# Altium PCB ledsayici.PcbDoc
Units mm, origin at the board's own origin, x right, y up, seen from the top; angles counter-clockwise.
Board outline 56.77 x 56.64 mm, 2 copper layers (Top Layer, Bottom Layer); 28 components, 24 nets, 76 pads, 0 vias.
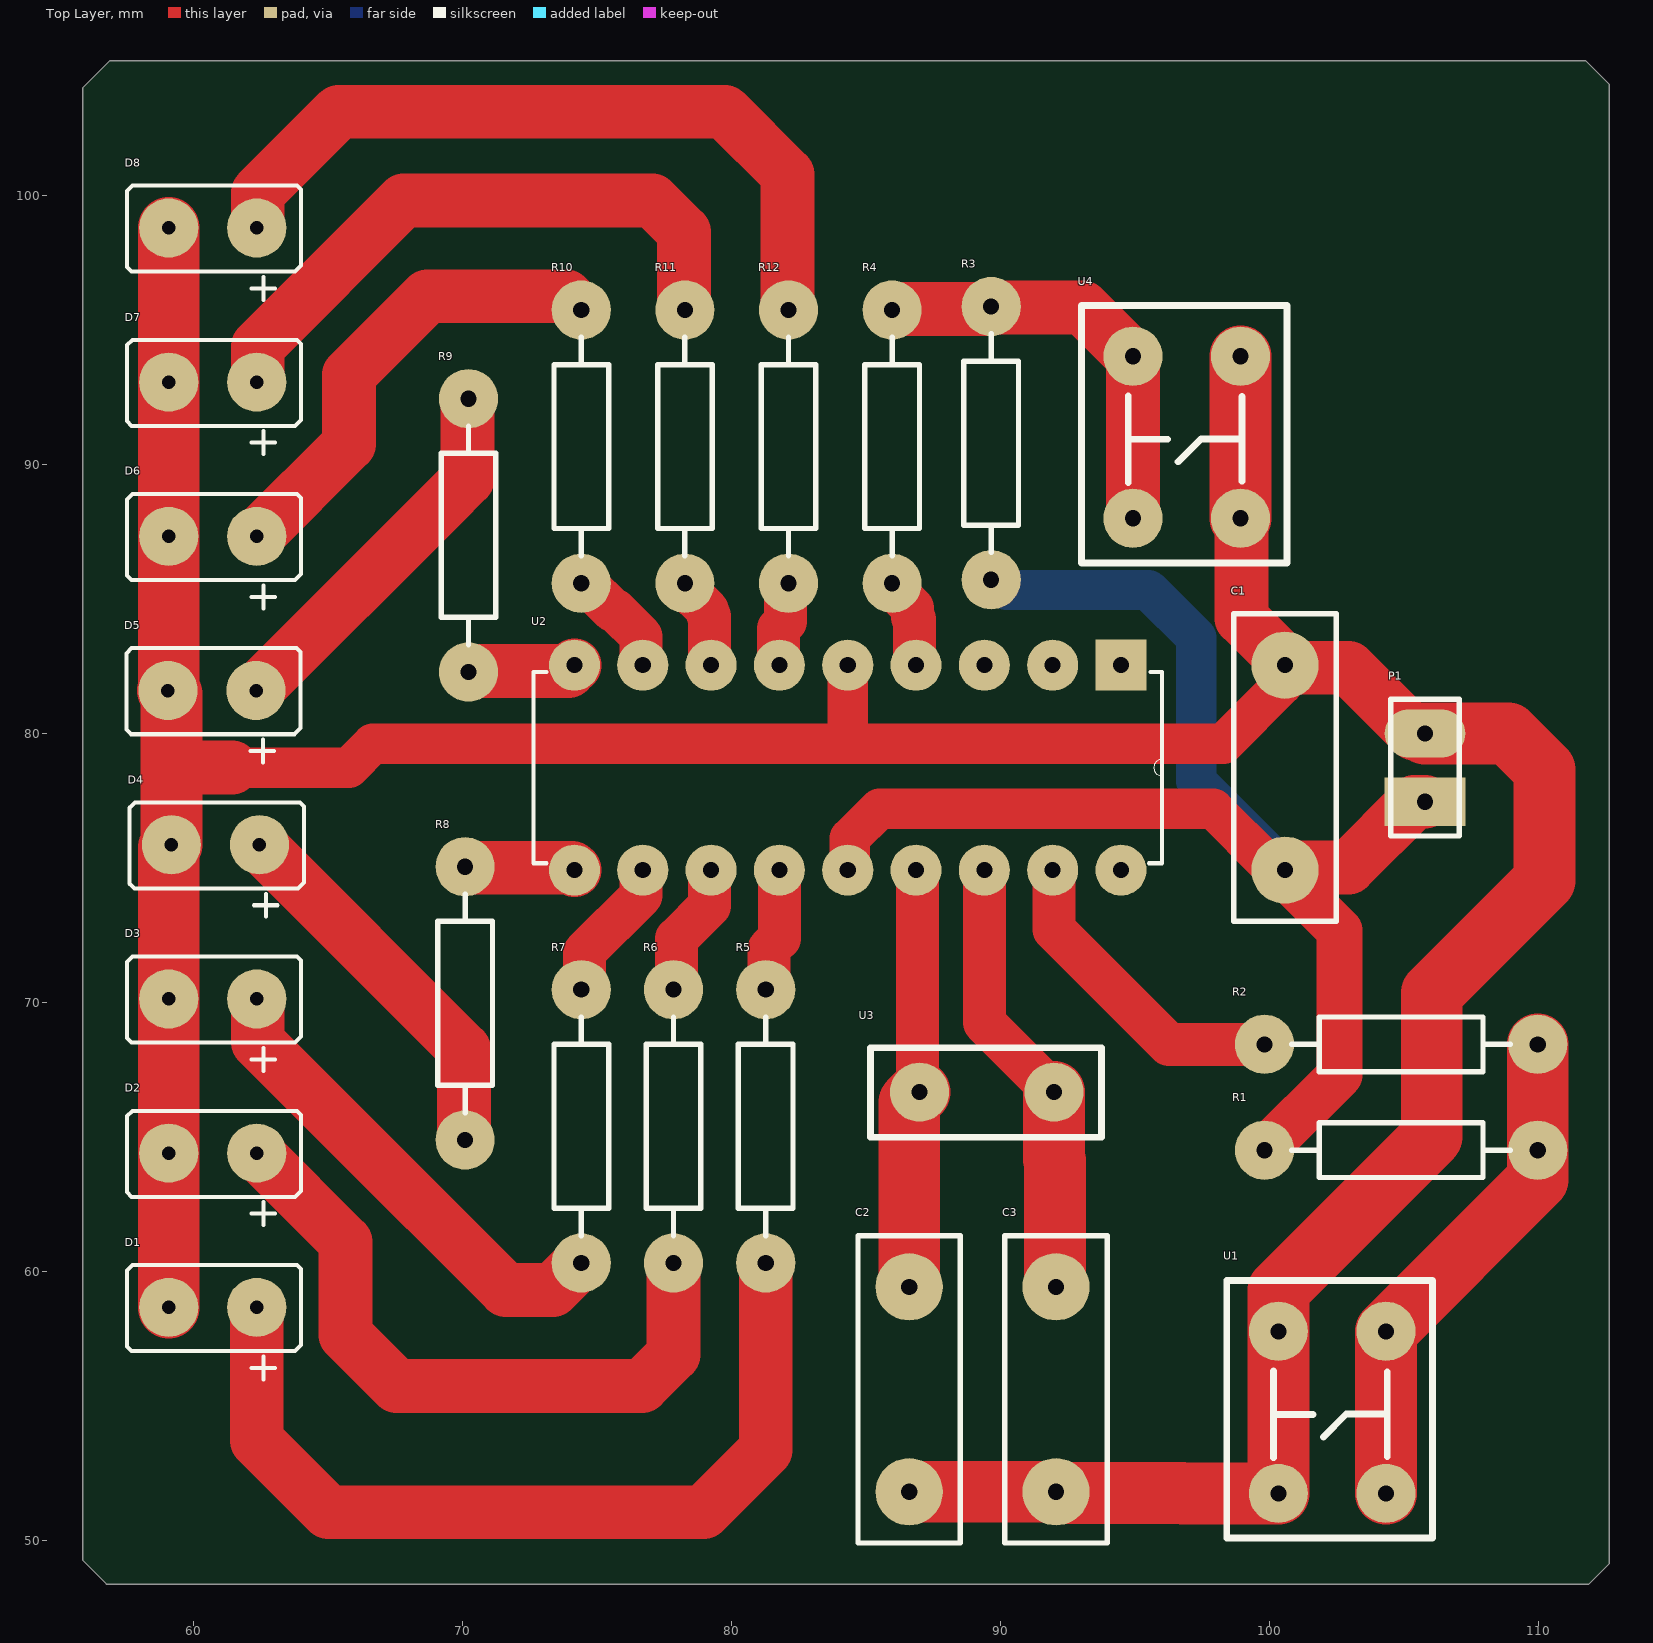
[diagram p0: Top Layer view]
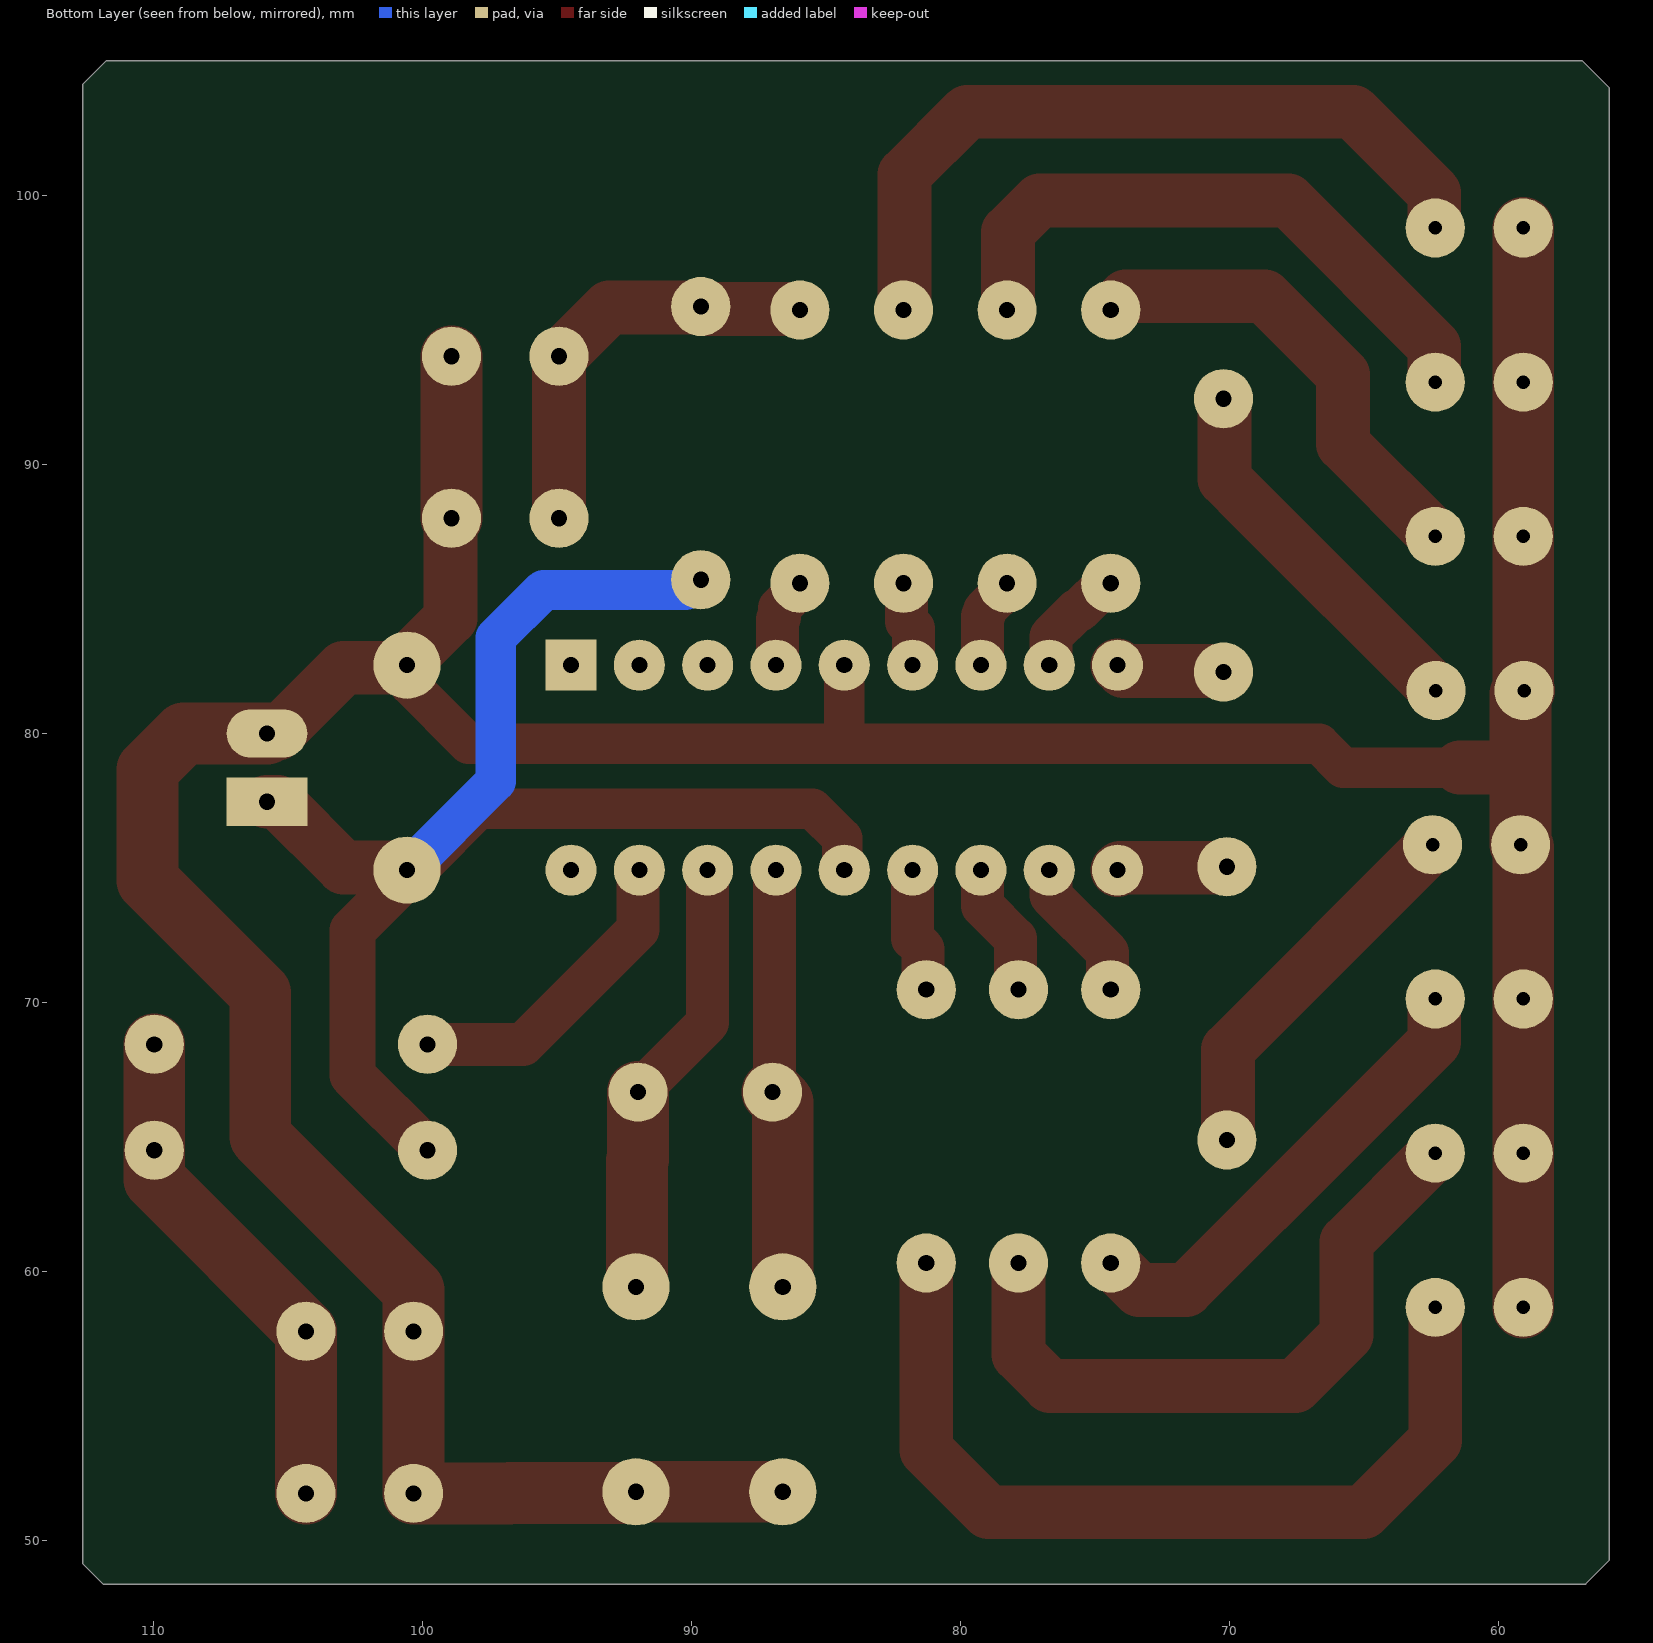
[diagram p1: Bottom Layer view, seen from below]

## Layer stack, top to bottom
Top Solder: solder mask 0.0102, Solder Resist, Dk 3.5
Top Layer: signal copper 0.0356
Dielectric 1: dielectric 0.32, FR-4, Dk 4.8
Bottom Layer: signal copper 0.0356
Bottom Solder: solder mask 0.0102, Solder Resist, Dk 3.5

## Board outline
55.88,49.276 55.88,104.013 56.896,105.029 111.76,105.029 112.649,104.14 112.649,49.149 111.887,48.387 56.769,48.387

## Design rules (kind name [scope] priority, off if disabled: settings)
Clearance [All] p1: gap=0.152 ignorepadtopadclearanceinfootprint=FALSE except(0: Arc-Hole Track-Hole SMDPad-Hole THPad-Hole Via-Hole Fill-Hole Poly-Hole Region-Hole Text-Hole)
HoleSize [All] p1: absolutevalues=TRUE maxlimit=3 minlimit=0.025 maxpercent=80.000 minpercent=20.000
PolygonConnect [All] p1: connectstyle=Relief reliefconductorwidth=0.254 reliefentries=4 polygonreliefangle="90 Angle" airgapwidth=0.254
RoutingVias [All] p1: holewidth=1 width=5 viastyle="Through Hole" minholewidth=0.711 minwidth=1.27 maxholewidth=2 maxwidth=3
SolderMaskExpansion [All] p1: expansion=0.102 istentingtop=FALSE
Width [All] p1: maxlimit=5 minlimit=0.254 preferedwidth=2 minimp=50.000000 maximp=50.000000 favimp=50.000000
29 further rules are at their usual default settings.

## Components (designator, comment, footprint, x,y, rotation, side; value= is the part's Value field where it differs from the comment)
C1 "Cap" RAD-0.3 100.584,78.74 r90 top value=100nF
C2 "Cap" RAD-0.3 86.614,55.626 r90 top value=22pF
C3 "Cap" RAD-0.3 92.075,55.626 r90 top value=22pF
D1 "led" led 62.357,58.674 r180 top
D2 "led" led 62.357,64.407 r180 top
D3 "led" led 62.357,70.14 r180 top
D4 "led" led 62.457,75.873 r180 top
D5 "led" led 62.33,81.607 r180 top
D6 "led" led 62.357,87.34 r180 top
D7 "led" led 62.357,93.073 r180 top
D8 "led" led 62.357,98.806 r180 top
P1 "Header 2" HDR1X2 105.791,77.47 r90 top
R1 "Res2" AXIAL-0.4 104.902,64.516 r0 top value=4.7Kohm
R2 "Res2" AXIAL-0.4 104.902,68.453 r0 top value=100ohm
R3 "Res2" AXIAL-0.4 89.662,90.805 r270 top value=4.7Kohm
R4 "Res2" AXIAL-0.4 85.979,90.678 r270 top value=100ohm
R5 "Res2" AXIAL-0.4 81.28,65.405 r90 top value=330ohm
R6 "Res2" AXIAL-0.4 77.851,65.405 r90 top value=330ohm
R7 "Res2" AXIAL-0.4 74.422,65.405 r90 top value=330ohm
R8 "Res2" AXIAL-0.4 70.104,69.977 r90 top value=330ohm
R9 "Res2" AXIAL-0.4 70.231,87.376 r270 top value=330ohm
R10 "Res2" AXIAL-0.4 74.422,90.678 r270 top value=330ohm
R11 "Res2" AXIAL-0.4 78.274,90.678 r270 top value=330ohm
R12 "Res2" AXIAL-0.4 82.127,90.678 r270 top value=330ohm
U1 "button" buton 102.489,56.007 r270 top
U2 "PIC16f628a" PCBComponent_1 84.582,79.121 r270 top
U3 "4mhz" 4mhz 91.995,66.675 r180 top
U4 "button" buton 97.083,92.261 r270 top

## Footprints (in the part's own frame and the unit in brackets; to place one, negate y for a bottom-side part, rotate by r counter-clockwise, add the part's x,y. Pads: shape width x height; smd on the part's side, far side on the other; paste and mask are expansions set on the pad)
4mhz [mm]
  round 2.2 hole 0.6: 1(0,0) 2(5,0)
  silkscreen extent -1.76,-1.65 6.83,1.67
AXIAL-0.4 [mm] "Axial Device, Thru-Hole; 2 Leads; 0.4 in Pin Spacing"
  round 2.2 hole 0.6: 1(-5.08,0) 2(5.08,0)
  silkscreen extent -4.06,-1.02 4.06,1.02
buton [mm]
  round 2.2 hole 0.6: 1(-1.775,1.85) 2(-1.775,-2.15) 3(4.25,1.85) 4(4.25,-2.15)
  silkscreen extent -3.66,-4.07 5.91,3.58
HDR1X2 [mm] "Connector; Header; 2 Position"
  rect 1.8x3 hole 0.6: 1(0,0)
  oval 1.8x3 hole 0.6: 2(2.54,0)
  silkscreen extent -1.27,-1.27 3.81,1.27
led [mm]
  round 2.2 hole 0.5: 1(0,0) 2(3.275,0)
  silkscreen extent -1.65,-1.58 4.82,2.67
PCBComponent_1 [mm]
  rect 1.9x1.9 hole 0.6: 1(-3.429,9.906)
  round 1.9 hole 0.6: 2(-3.429,7.366) 3(-3.429,4.826) 4(-3.429,2.286) 5(-3.429,-0.254) 6(-3.429,-2.794) 7(-3.429,-5.334) 8(-3.429,-7.874) 9(-3.429,-10.414) 10(4.191,-10.414) 11(4.191,-7.874) 12(4.191,-5.334) 13(4.191,-2.794) 14(4.191,-0.254) 15(4.191,2.286) 16(4.191,4.826) 17(4.191,7.366) 18(4.191,9.906)
  silkscreen extent -3.18,-11.94 3.94,11.43
RAD-0.3 [mm] "Radial Cap, Thru-Hole; 2 Leads; 0.3 in Pin Spacing"
  round 2.5 hole 0.6: 1(-3.81,0) 2(3.81,0)
  silkscreen extent -5.71,-1.91 5.71,1.91

## Part data
C1 C2 C3: "Capacitor", LatestRevisionDate=17-Jul-2002, LatestRevisionNote="Re-released for DXP Platform.", PackageDescription="Radial Cap, Thru-Hole; 2 Leads; 0.3 in Pin Spacing", PackageReference=RAD-0.3, Published=8-Jun-2000, Publisher="Altium Limited"
P1: "Header, 2-Pin", LatestRevisionDate=17-Jul-2002, LatestRevisionNote="Re-released for DXP Platform.", Publisher="Altium Limited"
R1 R2 R3 R4 R5 R6 R7 R8 R9 R10 R11 R12: "Resistor", LatestRevisionDate=17-Jul-2002, LatestRevisionNote="Re-released for DXP Platform.", PackageDescription="Axial Device, Thru-Hole; 2 Leads; 0.4 in Pin Spacing", PackageReference=AXIAL-0.4, Published=8-Jun-2000, Publisher="Altium Limited"

## Nets (pads, with @x,y where several pads share a name; then routed paths per layer and width w, separated by ;. In a path a pad name is that pad's centre, name@x,y a point inside that pad or via, vN(x,y) a via of type N, cw(c..) or ccw(c..) an arc to the next point about the centre after c; other vN are vias at no path point)
+5: C1.1 P1.1 R1.1 R3.2 U2.14 | length 56
  Top Layer w1.5: U2.14 84.405,75.007 84.405,76.111 85.509,77.216 97.919,77.216 100.013,75.121 100.393,75.121 C1.1
  Top Layer w1.7: R1.1 102.616,67.31 102.616,72.682 100.584,74.714 C1.1
  Top Layer w2: C1.1 100.68,75.026 102.947,75.026 105.391,77.47 P1.1
  Bottom Layer w1.5: R3.2 89.851,85.725 90.232,85.344 95.514,85.344 97.282,83.576 97.282,78.232 C1.1
GND: C1.2 C2.1 C3.1 D1.2 D2.2 D3.2 D4.2 D5.2 D6.2 D7.2 D8.2 P1.2 U1.2 U1.4 U2.5 U4.1 U4.3 | length 154.7
  Top Layer w1.5: 61.438,78.74 65.786,78.74 66.675,79.629 84.328,79.629 ; U2.5 84.328,79.629 ; C1.2@100.488,82.454 100.488,81.819 98.298,79.629 84.328,79.629
  Top Layer w2: 59.182,78.74 61.438,78.74 ; U4.3 98.971,87.973 98.971,84.298 100.584,82.685 C1.2 ; C1.2@100.488,82.454 C1.2 ; P1.2 105.391,80.01 102.947,82.454 100.68,82.454 C1.2
  Top Layer w2.3: D1.2 D2.2 D3.2 59.082,75.773 D4.2 59.182,78.74 59.182,81.48 D5.2 59.082,81.634 D6.2 D7.2 D8.2 ; C2.1 C3.1 92.113,51.778 96.767,51.778 96.788,51.757 U1.4 U1.2 100.339,59.318 106.045,65.024 106.045,70.358 110.236,74.549 110.236,78.663 108.889,80.01 P1.2 ; U4.3 U4.1
NetC2_2: C2.2 U2.15 U3.2 | length 15.7
  Top Layer w1.6: U2.15 86.925,74.873 86.925,66.745 U3.2
  Top Layer w2.3: C2.2 86.614,66.294 U3.2
NetC3_2: C3.2 U2.16 U3.1 | length 16.6
  Top Layer w1.6: U2.16 89.408,69.262 U3.1
  Top Layer w2.3: U3.1 91.995,64.17 92.037,64.128 92.037,59.474 C3.2
NetD1_1: D1.1 R5.1 | length 32.9
  Top Layer w2: D1.1 62.357,53.721 65.024,51.054 78.965,51.054 81.28,53.369 R5.1
NetD2_1: D2.1 R6.1 | length 25
  Top Layer w2: D2.1 65.659,61.105 65.659,57.658 67.564,55.753 76.679,55.753 77.851,56.925 R6.1
NetD3_1: D3.1 R7.1 | length 17.9
  Top Layer w2: D3.1 62.395,70.102 62.395,68.542 65.678,65.259 71.618,59.319 73.362,59.319 74.368,60.325 R7.1
NetD4_1: D4.1 R8.1 | length 14.1
  Top Layer w2: D4.1 70.066,68.265 70.066,64.935 R8.1
NetD5_1: D5.1 R9.1 | length 14.1
  Top Layer w2: D5.1 69.215,88.492 70.193,89.469 70.193,92.418 R9.1
NetD6_1: D6.1 R10.1 | length 17.5
  Top Layer w2: D6.1 65.786,90.769 65.786,93.345 68.707,96.266 73.86,96.266 74.368,95.758 R10.1
NetD7_1: D7.1 R11.1 | length 22.8
  Top Layer w2: D7.1 62.395,93.111 62.395,94.399 67.818,99.822 77.064,99.822 78.236,98.65 78.236,95.796 R11.1
NetD8_1: D8.1 R12.1 | length 28.3
  Top Layer w2: D8.1 62.395,98.844 62.395,100.114 65.405,103.124 79.756,103.124 82.088,100.792 82.088,95.796 R12.1
NetR1_2: R1.2 R2.2 U1.1 U1.3 | length 19
  Top Layer w2.3: U1.3 U1.1 109.982,63.425 R1.2 R2.2
NetR2_1: R2.1 U2.17 | length 11.8
  Top Layer w1.6: U2.17 92.005,74.873 92.005,72.714 96.266,68.453 R2.1
NetR3_1: R3.1 R4.1 U4.2 U4.4 | length 15.8
  Top Layer w2: R4.1 86.017,95.796 89.519,95.796 89.608,95.885 R3.1 89.7,95.847 93.068,95.847 94.879,94.036 U4.2 U4.4
NetR4_2: R4.2 U2.4 | length 3.4
  Top Layer w1.6: R4.2 85.979,85.436 86.741,84.674 86.741,84.328 86.811,84.258 86.811,82.607 U2.4
NetR5_2: R5.2 U2.13 | length 4.7
  Top Layer w1.6: R5.2 81.395,70.6 81.395,71.997 81.788,72.39 U2.13
NetR6_2: R6.2 U2.12 | length 5
  Top Layer w1.6: R6.2 77.966,70.6 77.966,72.378 79.191,73.603 79.191,74.873 U2.12
NetR7_2: R7.2 U2.11 | length 5.4
  Top Layer w1.6: R7.2 74.537,70.6 74.537,71.87 76.651,73.984 76.651,74.873 U2.11
NetR8_2: R8.2 U2.10 | length 4.1
  Top Layer w2: R8.2 70.142,75.019 74.079,75.019 U2.10
NetR9_2: R9.2 U2.9 | length 4
  Top Layer w2: R9.2 70.269,82.334 73.952,82.334 U2.9
NetR10_2: R10.2 U2.8 | length 4.1
  Top Layer w1.6: R10.2 74.584,85.598 75.6,84.582 75.692,84.582 76.651,83.623 76.651,82.607 U2.8
NetR11_2: R11.2 U2.7 | length 3.5
  Top Layer w1.6: R11.2 78.274,85.436 79.121,84.589 79.121,84.455 79.191,84.385 79.191,82.607 U2.7
NetR12_2: R12.2 U2.6 | length 3.2
  Top Layer w1.6: U2.6 81.752,82.586 81.752,83.911 82.012,84.171 82.012,85.483 R12.2
pads on no net: U2.1 U2.2 U2.3 U2.18

## Silkscreen, mask and mechanical layers (free items; w line width, h text height)
Mechanical 13:
  lines w0.254: 55.88,49.276 56.769,48.387 111.887,48.387 112.649,49.149 112.649,104.14 111.76,105.029 56.896,105.029 55.88,104.013 55.88,50.546 55.88,49.276